# Altium PCB UPDATE of PCB2.PcbDoc
Units mm, origin at the board's own origin, x right, y up, seen from the top; angles counter-clockwise.
Board outline 152.4 x 101.6 mm, 2 copper layers (Top Layer, Bottom Layer); 49 components, 40 nets, 237 pads, 69 vias.
Unrouted connection lines stored in the file: 2.
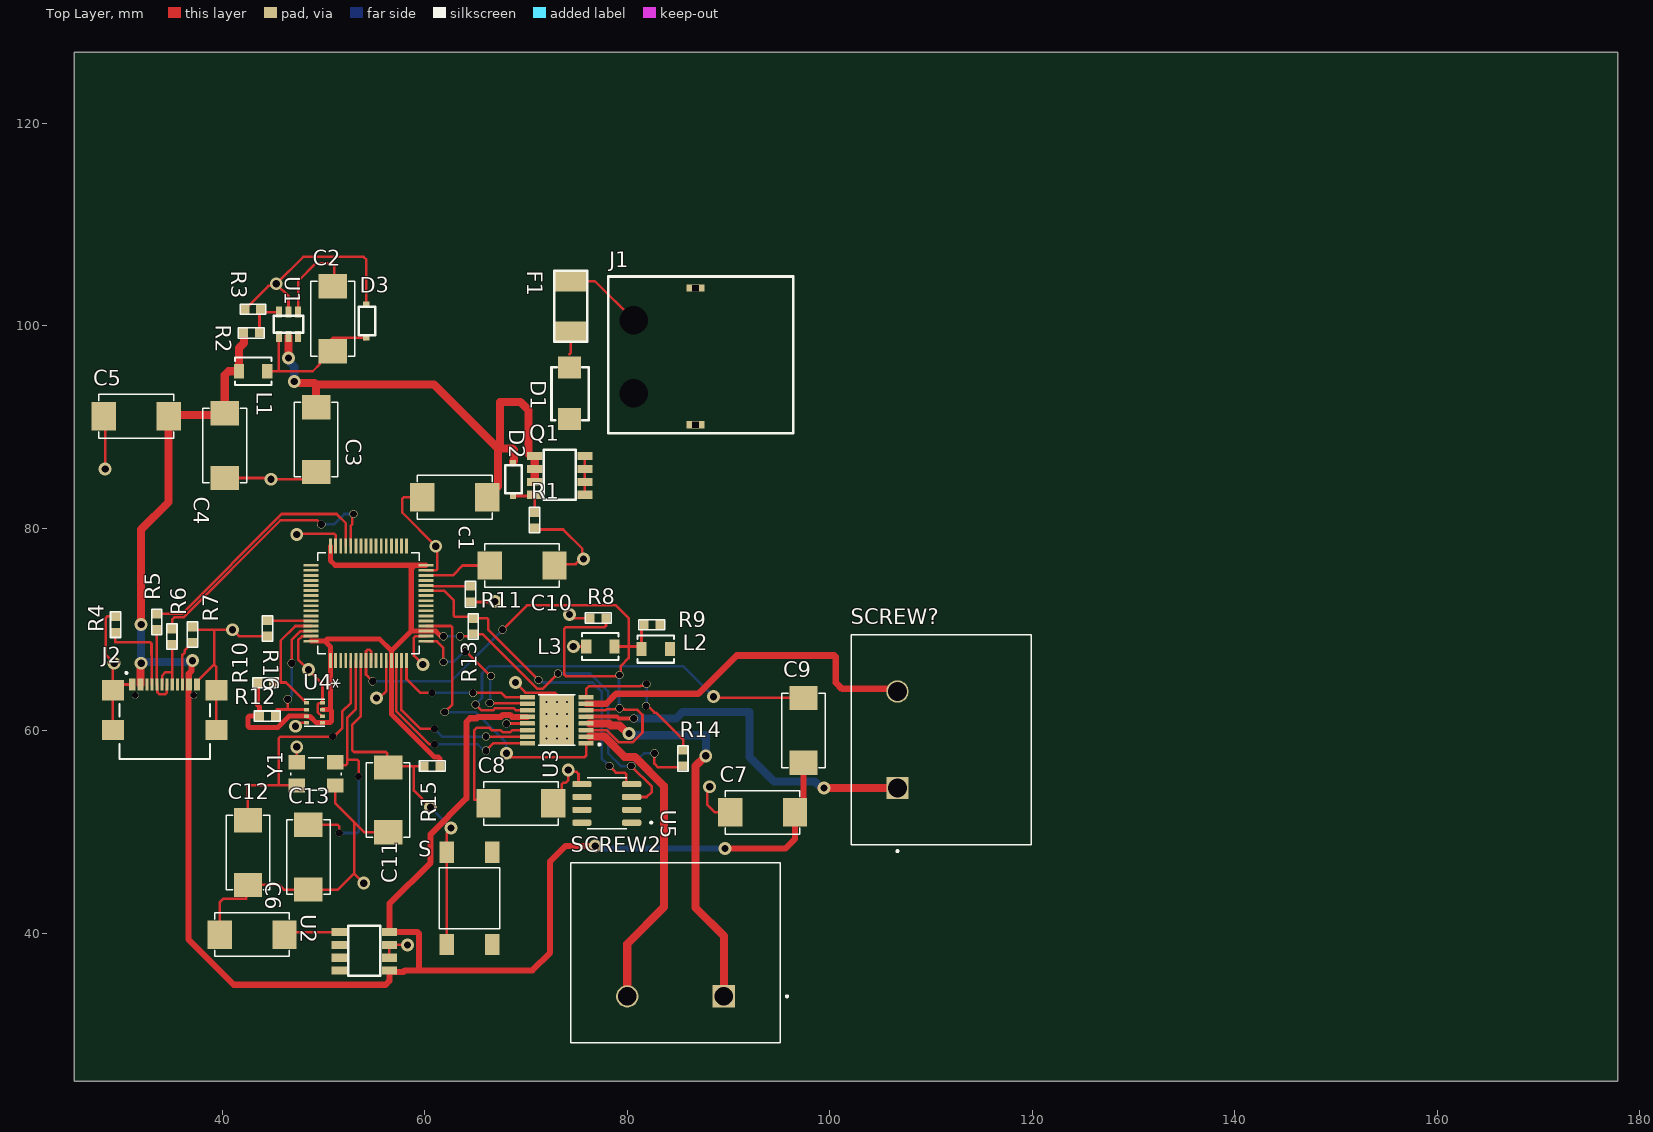
[diagram p0: Top Layer view]
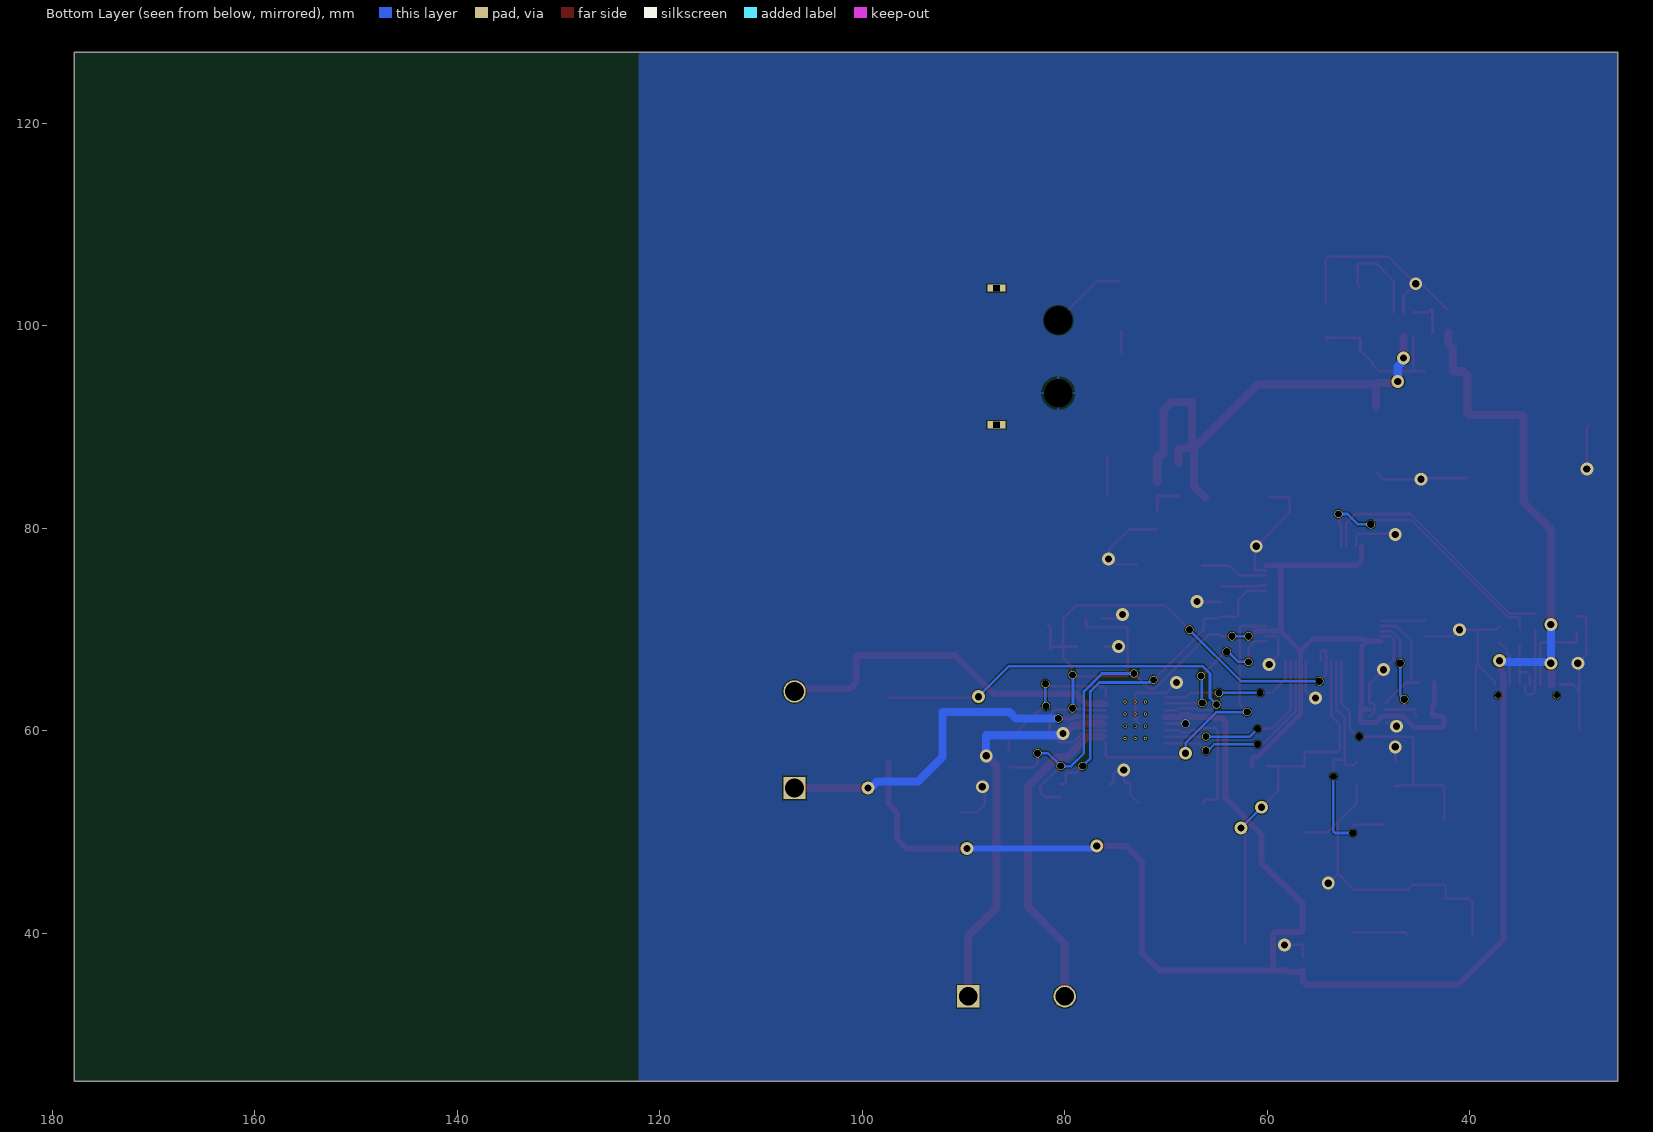
[diagram p1: Bottom Layer view, seen from below]

## Layer stack, top to bottom
Top Solder: solder mask 0.0102, Solder Resist, Dk 3.5
Top Layer: signal copper 0.0356
Dielectric 1: dielectric 0.32, FR-4, Dk 4.8
Bottom Layer: signal copper 0.0356
Bottom Solder: solder mask 0.0102, Solder Resist, Dk 3.5

## Board outline
25.4,25.4 177.8,25.4 177.8,127 25.4,127

## Design rules (kind name [scope] priority, off if disabled: settings)
Clearance [All] p1: gap=0.1 ignorepadtopadclearanceinfootprint=FALSE
PolygonConnect [All] p1: connectstyle=Relief reliefconductorwidth=0.254 reliefentries=4 polygonreliefangle="90 Angle" airgapwidth=0.254
RoutingVias [All] p1: holewidth=0.711 width=1.27 viastyle="Through Hole" minholewidth=0.711 minwidth=0.1 maxholewidth=0.711 maxwidth=1.27
SolderMaskExpansion [All] p1: expansion=0.102 istentingtop=FALSE
SupplyNets "Schematic Supply Nets_4" [InNet('+5')] p1: voltage=0.000
SupplyNets "Schematic Supply Nets_3" [InNet('24V')] p2: voltage=0.000
SupplyNets "Schematic Supply Nets_2" [InNet('+3.3')] p3: voltage=0.000
SupplyNets "Schematic Supply Nets_1" [InNet('+3V3')] p4: voltage=0.000
SupplyNets "Schematic Supply Nets" [InNet('GND')] p5: voltage=0.000
Width [All] p1: maxlimit=0.254 minlimit=0.254 preferedwidth=0.254
30 further rules are at their usual default settings.

## Components (designator, comment, footprint, x,y, rotation, side; value= is the part's Value field where it differs from the comment)
* "mcu" MCU 68.298,91.141 r90 top
c1 "100 uF" "CAPACITOR SMD" 43.028,-140.716 r180 top
C2 "100 uF" "CAPACITOR SMD" 274.701,80.747 r270 top
C3 "4.7uF" "CAPACITOR SMD" 273.05,68.809 r270 top
C4 "3.3uF" "CAPACITOR SMD" 264.033,68.224 r270 top
C5 "1 uF" "CAPACITOR SMD" 51.46,314.833 r0 top
C6 "1 uF" "CAPACITOR SMD" 62.89,263.652 r0 top
C7 "10 uF" "CAPACITOR SMD" 73.431,-171.831 r180 top
C8 "2.2 nF" "CAPACITOR SMD" 89.433,276.606 r0 top
C9 "0.01 uF" "CAPACITOR SMD" 321.183,40.107 r270 top
C10 "22 uF" "CAPACITOR SMD" 89.56,300.101 r0 top
C11 "100nF" "CAPACITOR SMD" -167.386,73.127 r90 top
C12 "20 pF" "CAPACITOR SMD" 266.319,28.042 r270 top
C13 "1000 uF" "CAPACITOR SMD" -175.26,67.462 r90 top
D1 "TVS diode" "TVS DIODE" -241.427,396.367 r90 top
D2 "zener diode" "ZENER DIODE" 70.231,89.154 r90 top
D3 "550mV 1A" ?#1 54.229,100.584 r90 top
F1 "fuse" FUSE -386.334,721.106 r90 top
J1 "Connector" CONNECTOR 84.582,92.798 r270 top
J2 "USB4110GFA" GCT_USB4110GFA 34.321,63.5 r0 top
L1 "15uH" INDUCTOR 30.483,91.186 r0 top
L2 "1uH" INDUCTOR 70.234,63.754 r0 top
L3 "1uH" INDUCTOR 89.919,72.644 r180 top
Q1 "Mosfet" MOSFET-DMP3007LSS 74.041,84.201 r270 top
R1 "10k" RESISTOR 71.863,-62.052 r90 top
R2 "58K" RESISTOR 185.75,100.311 r180 top
R3 "10K" RESISTOR -99.822,100.603 r0 top
R4 "5.1K" RESISTOR 28.467,213.36 r270 top
R5 "22" RESISTOR 32.531,213.614 r270 top
R6 "22" RESISTOR 36.049,-73.558 r90 top
R7 "5.1K" RESISTOR 38.081,-73.355 r90 top
R8 "0.1" RESISTOR -65.735,70.123 r0 top
R9 "0.1" RESISTOR 225.298,71.482 r180 top
R10 "4.7k" RESISTOR 187.147,65.767 r180 top
R11 "10K" RESISTOR 63.519,216.357 r270 top
R12 "4.7k" RESISTOR 187.325,62.465 r180 top
R13 "4.7k" RESISTOR 63.773,213.182 r270 top
R14 "10K" RESISTOR 84.474,200.152 r270 top
R15 "10K" RESISTOR -82.118,55.518 r0 top
R16 "22" RESISTOR 43.453,212.979 r270 top
S "switch" SWITCH 51.979,61.109 r270 top
SCREW2 "screw" screw 195.072,404.368 r180 top
SCREW? "screw" screw 477.266,-51.181 r90 top
U1 "buck" ?#2 -64.892,108.966 r270 top
U2 "LDO" LDO -57.658,47.117 r270 top
U3 "DRV8833PWP" IC_DRV8833PWP 73.041,61.052 r180 top
U4 "TEMP" "TEMP SENSOR" 44.158,61.778 r180 top
U5 "DS18B20Z+" SOIC127P600X175-8N 77.978,52.832 r180 top
Y1 "CRYSTAL" PCBComponent_1 48.382,48.507 r270 top

## Footprints (in the part's own frame and the unit in brackets; to place one, negate y for a bottom-side part, rotate by r counter-clockwise, add the part's x,y. Pads: shape width x height; smd on the part's side, far side on the other; paste and mask are expansions set on the pad)
"CAPACITOR SMD" [mm]
  rect 2.4x2.8 smd: 1(-23.139,-223.774) 2(-16.739,-223.774)
  silkscreen extent -23.62,-225.93 -16.26,-221.61, body extent -23.64,-225.92 -16.24,-221.62, height 1.9
CONNECTOR [mil]
  round 60 hole 110.24: 1(-305,-155) 2(-21.54,-155)
  rect 27.56x70.87 hole 23.62 square: 28(-430,85) 28(101.5,85)
  silkscreen extent -475,-255 135,465, body extent -470,-224 140,454, height 331
FUSE [mm]
  rect 1.96x3.15 smd: 1(-621.665,-460.756) 2(-616.745,-460.756)
  silkscreen extent -622.68,-462.41 -615.7,-459.1, body extent -622.3,-462.15 -616.2,-459.36, height 2.53
GCT_USB4110GFA [mm]
  rect 0.6x1.15 smd: A1/B12(-3.2,1.075) A4/B9(-2.4,1.075) B1/A12(3.2,1.075) B4/A9(2.4,1.075)
  rect 0.3x1.15 smd: A5(-1.25,1.075) A6(-0.25,1.075) A7(0.25,1.075) A8(1.25,1.075) B5(1.75,1.075) B6(0.75,1.075) B7(-0.75,1.075) B8(-1.75,1.075)
  rect 2.18x2 smd: S1(-5.11,0.5) S2(5.11,0.5) S3(-5.11,-3.43) S4(5.11,-3.43)
  round 0.65 hole 0.65 unplated: ""(-2.89,0) ""(2.89,0)
  silkscreen extent -4.47,-6.28 4.47,2.33, body extent -5.65,-6.28 5.65,1.42, height 3.26
IC_DRV8833PWP [mm]
  rrect25% 1.5x0.45 smd: 1(-2.9,2.275) 2(-2.9,1.625) 3(-2.9,0.975) 4(-2.9,0.325) 5(-2.9,-0.325) 6(-2.9,-0.975) 7(-2.9,-1.625) 8(-2.9,-2.275) 9(2.9,-2.275) 10(2.9,-1.625) 11(2.9,-0.975) 12(2.9,-0.325) 13(2.9,0.325) 14(2.9,0.975) 15(2.9,1.625) 16(2.9,2.275)
  rect 3.4x5 smd paste-3 mask+0: 17(0,0)
  round 0.3 hole 0.2 mask+0: 18(-1,1.8) 19(0,1.8) 20(1,1.8) 22(0,0.6) 23(1,0.6) 24(-1,-0.6) 25(0,-0.6) 26(1,-0.6) 27(-1,-1.8) 28(0,-1.8) 29(1,-1.8) ""(-1,0.6)
  silkscreen extent -4.3,-2.5 1.83,2.5, body extent -3.2,-2.5 3.2,2.5, height 1.2
INDUCTOR [mm]
  rect 1x1.4 smd paste+0 mask+0.102: 1(11.173,4.318) 2(13.973,4.318)
  silkscreen extent 10.77,2.97 14.37,5.67, body extent 10.89,3.19 14.25,5.7, height 2.17
LDO [mm]
  rect 0.802x1.505 smd mask-2539.97: 1(6.985,109.22) 2(8.255,109.22) 3(9.525,109.22) 4(10.795,109.22) 5(6.985,114.173) 6(8.255,114.173) 7(9.525,114.173) 8(10.795,114.173)
  silkscreen extent 6.35,110.11 11.3,113.28, body extent 6.31,108.81 11.21,114.81, height 1.75
MCU [mm]
  rect 1.47x0.28 smd: 1(-24.212,17.593) 2(-24.212,17.093) 3(-24.212,16.593) 4(-24.212,16.093) 5(-24.212,15.593) 6(-24.212,15.093) 7(-24.212,14.593) 8(-24.212,14.093) 9(-24.212,13.593) 10(-24.212,13.093) 11(-24.212,12.593) 12(-24.212,12.093) 13(-24.212,11.593) 14(-24.212,11.093) 15(-24.212,10.593) 16(-24.212,10.093) 33(-12.872,10.093) 34(-12.872,10.593) 35(-12.872,11.093) 36(-12.872,11.593) 37(-12.872,12.093) 38(-12.872,12.593) 39(-12.872,13.093) 40(-12.872,13.593) 41(-12.872,14.093) 42(-12.872,14.593) 43(-12.872,15.093) 44(-12.872,15.593) 45(-12.872,16.093) 46(-12.872,16.593) 47(-12.872,17.093) 48(-12.872,17.593)
  rect 0.28x1.47 smd: 17(-22.292,8.173) 18(-21.792,8.173) 19(-21.292,8.173) 20(-20.792,8.173) 21(-20.292,8.173) 22(-19.792,8.173) 23(-19.292,8.173) 24(-18.792,8.173) 25(-18.292,8.173) 26(-17.792,8.173) 27(-17.292,8.173) 28(-16.792,8.173) 29(-16.292,8.173) 30(-15.792,8.173) 31(-15.292,8.173) 32(-14.792,8.173) 49(-14.792,19.513) 50(-15.292,19.513) 51(-15.792,19.513) 52(-16.292,19.513) 53(-16.792,19.513) 54(-17.292,19.513) 55(-17.792,19.513) 56(-18.292,19.513) 57(-18.792,19.513) 58(-19.292,19.513) 59(-19.792,19.513) 60(-20.292,19.513) 61(-20.792,19.513) 62(-21.292,19.513) 63(-21.792,19.513) 64(-22.292,19.513)
  silkscreen extent -23.54,8.84 -13.54,18.84, body extent -24.54,7.84 -12.54,19.84, height 1.59
MOSFET-DMP3007LSS [mil]
  rect 31.57x59.25 smd mask-99999: D(-115,70) D(-65,70) D(-15,70) D(35,70) G(35,-125) S(-115,-125) S(-65,-125) S(-15,-125)
  silkscreen extent -140,-90 55,35, body extent -138,-141 55,96, height 69
PCBComponent_1 [mm]
  rect 1.4x1.6 smd: 1(-8.389,2.789) 2(-8.389,-1.011) 3(-6.089,-1.011) 4(-6.089,2.789)
  silkscreen extent -8.84,-1.61 -5.64,3.39, body extent -8.84,-1.61 -5.64,3.39, height 1
RESISTOR [mm]
  rect 0.9x0.95 smd mask+0.05: 1(143.637,0.997) 2(142.062,0.997)
  silkscreen extent 141.6,0.51 144.14,1.52, body extent 142.07,0.62 143.68,1.42, height 0.55
screw [mil]
  rect 86.78x86.78 / inner round 86.78 / far side rect 86.78x86.78 hole 72.99 mask+4.02: 1(4155,14590)
  round 86.78 hole 72.99 mask+4.02: 2(4530.2,14590)
  silkscreen extent 3905,14070 4750,14770, body extent 3934,14075 4745,14775, height 345
SOIC127P600X175-8N [mm]
  rrect50% 1.9x0.6 smd paste+0 mask+0.102: 1(-2.455,1.905) 2(-2.455,0.635) 3(-2.455,-0.635) 4(-2.455,-1.905) 5(2.455,-1.905) 6(2.455,-0.635) 7(2.455,0.635) 8(2.455,1.905)
  silkscreen extent -4.49,-2.52 1.95,2.52, body extent -3,-2.49 3,2.49, height 1.68
SWITCH [mm]
  rect 2.1x1.4 smd paste+0 mask+0.102: 1(13.103,14.696) 2(22.203,14.696) 3(13.103,10.196) 4(22.203,10.196)
  silkscreen extent 14.65,9.45 20.65,15.45, body extent 13.03,9.45 23.03,15.45, height 4.28
"TEMP SENSOR" [mm]
  rect 0.5x0.35 smd: 1(-4.153,0.975) 2(-4.153,0.325) 3(-4.153,-0.325) 4(-4.153,-0.975) 5(-5.753,-0.975) 6(-5.753,-0.325) 7(-5.753,0.325) 8(-5.753,0.975)
  silkscreen extent -5.95,-1.35 -3.95,1.35, body extent -5.95,-1.25 -3.95,1.25, height 1
"TVS DIODE" [mm]
  rect 2.16x2.26 smd: (+)(-305.562,-315.722) (-)(-300.482,-315.722)
  silkscreen extent -305.69,-317.63 -300.48,-313.94, body extent -305.85,-317.53 -300.45,-313.91, height 2.5
"ZENER DIODE" [mm]
  rect 0.55x0.6 smd: 1(-5.969,1.524) 2(-2.667,1.524)
  silkscreen extent -5.71,0.63 -2.92,2.29, body extent -6.22,0.69 -2.42,2.29, height 1
?#1 [mm]
  rect 0.55x0.6 smd: 1(-1.778,0) 2(1.524,0)
  silkscreen extent -1.52,-0.89 1.27,0.76, body extent -2.03,-0.84 1.77,0.76, height 1
?#2 [mm]
  rect 1.1x0.6 smd: 1(7.62,112.39) 2(7.62,111.44) 3(7.62,110.49) 4(10.033,112.39) 5(10.033,111.44) 6(10.033,110.49)
  silkscreen extent 8,109.98 9.65,112.9, body extent 7.49,110.06 10.29,112.96, height 1.1

## Part data
c1 C2 C3 C4 C5 C6 C7 C8 C9 C10 C11 C12 C13: library part "capacitor SMD"
D3: library part diode
J1: library part hkhk
J2: "USB-C (USB TYPE-C) USB 2.0 Receptacle Connector 24 (16+8 Dummy) Position Surface Mount, Right Angle", Package=None, Check_prices=https://www.snapeda.com/parts/USB4110GFA/Global+Connector+Technology/view-part/?ref=eda, MF="Global Connector Technology", MP=USB4110GFA, SnapEDA_Link=https://www.snapeda.com/parts/USB4110GFA/Global+Connector+Technology/view-part/?ref=snap
L1 L2 L3: library part inductor
R1 R2 R3 R4 R5 R6 R7 R8 R9 R10 R11 R12 R13 R14 R15 R16: library part resistor
U3: "10.8-V, 2-A dual H-bridge motor driver with current regulation", Package="HTSSOP-16 Texas Instruments", Check_prices=https://www.snapeda.com/parts/DRV8833PWP/Texas+Instruments/view-part/?ref=eda, MF="Texas Instruments", MP=DRV8833PWP, SnapEDA_Link=https://www.snapeda.com/parts/DRV8833PWP/Texas+Instruments/view-part/?ref=snap
U5: "Programmable Resolution 1-Wire Digital Thermometer", Package="SOIC-8 Maxim", Check_prices=https://www.snapeda.com/parts/DS18B20Z+/Analog+Devices/view-part/?ref=eda, MF="Analog Devices", MP=DS18B20Z+, SnapEDA_Link=https://www.snapeda.com/parts/DS18B20Z+/Analog+Devices/view-part/?ref=snap

## Via types
v1: diameter 1.27, hole 0.711, Top Layer to Bottom Layer, 35 vias
v2: diameter 0.8, hole 0.711, Top Layer to Bottom Layer, 28 vias
v3: diameter 0.711, hole 0.711, Top Layer to Bottom Layer, 6 vias

## Nets (pads, with @x,y where several pads share a name; then routed paths per layer and width w, separated by ;. In a path a pad name is that pad's centre, name@x,y a point inside that pad or via, vN(x,y) a via of type N, cw(c..) or ccw(c..) an arc to the next point about the centre after c; other vN are vias at no path point)
1: R14.2 U3.8 | length 15.3
  Top Layer w0.254: U3.8 75.941,64.13 76.2,64.389 81.258,64.389 81.318,64.449 81.721,64.449 v2(81.915,64.643) ; v2(81.864,62.433) 82.04,62.433 82.671,61.803 82.85,61.803 85.517,59.136 85.517,58.136 R14.2
  Bottom Layer w0.254: v2(81.864,62.433) 81.915,62.484 v2(81.915,64.643)
3: *.44 R6.1 | length 26.7
  Top Layer w0.254: R6.1 35.052,70.971 35.279,71.198 36.164,71.198 45.738,80.772 49.403,80.772 v2(49.784,80.391) ; *.44 52.705,80.264 52.832,80.391 52.832,81.28 v2(52.959,81.407)
  Bottom Layer w0.254: v2(49.784,80.391) 51.054,80.391 52.07,81.407 v2(52.959,81.407)
6: *.45 R5.2 | length 25.4
  Top Layer w0.254: R5.2 36.017,71.552 45.872,81.407 51.308,81.407 52.205,80.51 *.45
8: *.8 *.9 L2.1 L3.1 R8.1 R9.1 U3.3 U3.6 | length 77.5
  Top Layer w0.254: *.9 54.718,66.942 54.718,67.799 54.737,67.818 54.564,67.991 54.354,67.991 54.205,67.842 *.8 54.205,65.556 v2(54.864,64.897) ; v2(67.691,69.977) 70.104,72.39 78.867,72.39 80.137,71.12 80.137,68.326 ; U3.3 77.972,60.077 79.182,58.867 80.531,58.867 81.507,59.842 81.507,61.571 81.002,62.076 79.712,62.076 79.761,62.125 77.956,62.125 77.858,62.027 U3.6 ; R8.1 77.902,70.38 77.753,70.231 73.936,70.231 73.787,70.082 73.787,65.554 73.936,65.405 79.148,65.405 v2(79.248,65.505) ; L3.1 80.137,68.326 ; v2@79.298,65.455 79.375,65.532 79.375,66.421 80.137,67.183 80.137,68.326 ; R9.1 81.407,70.231 L2.1 81.153,68.326 80.137,68.326
  Bottom Layer w0.254: v2(54.864,64.897) 62.611,64.897 v2(67.691,69.977) ; v2@79.121,62.23 79.184,62.293 79.184,65.441 v2(79.248,65.505)
  other v2: 79.248,62.23
24V: c1.1 C3.1 D2.2 Q1.S U1.5 | length 53.3
  Top Layer w0.8: v1(46.548,96.808) U1.5 ; v1(47.117,94.488) 47.244,94.361 49.127,94.361 49.276,94.212 ; C3.1 49.276,94.212 ; c1.1 67.24,84.131 67.24,87.687 67.339,87.786 ; D2.2 D2.2@68.707,86.614 ; D2.2@68.834,86.614 68.834,87.735 68.685,87.884 67.437,87.884 ; Q1.S@70.866,84.582 70.866,85.852 70.866,87.122 70.514,87.122 70.24,87.396 70.24,87.642 70.231,87.652 70.231,91.694 69.469,92.456 67.437,92.456 67.437,87.884 ; 49.276,94.212 60.912,94.212 67.339,87.786 ; 67.339,87.786 67.437,87.884
  Bottom Layer w0.8: v1(46.548,96.808) 46.548,96.533 47.117,95.964 v1(47.117,94.488)
+3.3: *.1 *.13 *.19 *.32 *.48 *.64 R10.1 R12.1 R13.1 R14.1 R15.1 U4.2 U4.6 U4.8 U5.3 | length 110.8
  Top Layer w0.254: v2(63.5,69.342) 64.567,69.342 R13.1 65.71,69.545 71.12,64.135 71.628,64.135 v2(73.152,65.659) ; v2(80.391,56.515) 82.423,54.483 82.423,53.975 81.915,53.467 U5.3 ; v2(82.677,57.785) 82.677,56.769 83.058,56.388 85.344,56.388 R14.1
  Top Layer w0.5: R10.1 43.51,62.535 43.688,62.357 R12.1 42.694,61.468 42.545,61.319 42.545,60.474 42.694,60.325 45.496,60.325 46.624,61.453 U4.2 48.359,61.405 48.678,61.405 49.28,60.803 U4.8 50.651,60.803 50.8,60.952 50.8,61.954 50.651,62.103 ; *.64 50.15,68.849 ; U4.6 50.651,62.103 ; *.48 50.705,76.803 51.159,76.349 59.055,76.349 ; *.32 59.055,76.349 ; R15.1 61.519,57.255 61.37,57.404 60.96,57.404 56.705,61.659 *.13 56.718,66.942 56.718,67.894 ; v2(61.849,69.342) 61.595,69.342 61.101,69.836 60.138,69.836 *.19 58.673,69.849 ; 50.15,68.849 50.389,69.088 55.524,69.088 56.718,67.894 ; 50.15,68.849 50.705,68.294 *.1 50.705,62.157 50.651,62.103 ; 56.718,67.894 58.673,69.849 ; 58.673,69.849 58.673,75.967 59.055,76.349
  Bottom Layer w0.254: v2(61.849,69.342) v2(63.5,69.342) ; v2(73.152,65.659) 76.327,65.659 78.105,63.881 78.105,57.785 79.375,56.515 v2(80.391,56.515) 81.661,57.785 v2(82.677,57.785)
+3V3: C6.2 U2.1 | length 5.5
  Top Layer w0.254: C6.2 46.405,40.132 U2.1
+5: C4.1 C5.2 C7.1 C9.2 J2.A4/B9 J2.B4/A9 L1.1 R2.1 U2.5 U2.8 U3.12 | length 194.3
  Top Layer w0.6: v1(37.084,66.929) 36.979,66.824 36.979,65.913 36.703,65.637 36.703,64.593 J2.B4/A9 36.659,64.513 36.659,39.414 41.148,34.925 56.134,34.925 56.515,35.306 U2.8 56.642,36.195 57.89,36.195 58.039,36.344 59.436,36.344 ; U3.12 68.62,61.377 68.429,61.568 67.715,61.568 67.524,61.377 65.263,61.377 65.127,61.241 64.486,61.241 64.116,60.871 64.116,53.321 60.579,49.784 60.579,46.99 56.515,42.926 U2.5 59.287,40.132 59.436,39.983 59.436,36.344 ; v1(76.835,48.641) 73.914,48.641 72.39,47.117 72.39,38.1 70.634,36.344 59.436,36.344 ; v1(89.662,48.387) 95.631,48.387 96.57,49.326 C7.1 97.409,52.782 C9.2
  Top Layer w0.8: J2.A4/B9 31.921,66.592 v1(32.004,66.675) ; v1(32.004,70.485) 32.004,79.883 34.721,82.6 C5.2 34.848,91.186 40.082,91.186 C4.1 40.259,95.123 40.64,95.504 L1.1 41.656,97.79 42.164,98.298 42.164,99.263 R2.1
  Bottom Layer w0.6: v1(76.835,48.641) 77.089,48.387 v1(89.662,48.387)
  Bottom Layer w0.8: v1(32.004,70.485) v1(32.004,66.675) 32.131,66.802 36.957,66.802 v1(37.084,66.929)
AIN1: *.14 U3.16 | length 19.9
  Top Layer w0.254: *.14 57.205,61.921 60.439,58.687 60.947,58.687 v3(60.96,58.674) ; v2(66.04,58.039) 66.778,58.777 U3.16
  Bottom Layer w0.254: v3(60.96,58.674) 65.238,58.674 65.873,58.039 v2(66.04,58.039)
AIN2: *.15 U3.15 | length 18.4
  Top Layer w0.254: *.15 57.705,62.056 59.563,60.198 v3(60.96,60.198) ; v2(66.04,59.436) 66.049,59.427 U3.15
  Bottom Layer w0.254: v3(60.96,60.198) 61.722,59.436 v2(66.04,59.436)
BIN1: *.16 U3.9 | length 14.5
  Top Layer w0.254: *.16 58.205,65.112 59.563,63.754 v3(60.706,63.754) ; v2(64.77,63.754) 67.564,63.754 67.991,63.327 U3.9
  Bottom Layer w0.254: v3(60.706,63.754) v2(64.77,63.754)
BIN2: *.17 U3.10 | length 16
  Top Layer w0.254: *.17 60.138,68.836 61.212,68.836 61.849,68.199 v2(61.849,66.802) ; v2(64.008,67.818) 64.072,67.818 66.484,65.405 v2(66.548,65.405) ; v2(66.421,62.738) 70.08,62.738 U3.10
  Bottom Layer w0.254: v2(61.849,66.802) 62.865,66.802 63.881,67.818 v2(64.008,67.818) ; v2(66.421,62.738) 66.484,62.801 66.484,65.341 v2(66.548,65.405)
DQ: *.27 R13.2 U5.4 | length 34.2
  Top Layer w0.254: *.27 61.914,73.849 62.865,72.898 62.865,71.396 63.014,71.247 64.643,71.247 R13.2 66.145,71.12 66.294,70.971 66.294,69.977 v2(71.247,65.024) ; v2(78.232,56.515) 78.867,55.88 79.734,55.88 79.883,55.731 79.883,54.908 80.054,54.737 U5.4
  Bottom Layer w0.254: v2(71.247,65.024) 71.395,65.024 71.649,64.77 76.581,64.77 77.47,63.881 77.47,57.277 77.978,56.769 78.232,56.769 v2(78.232,56.515)
GND: *.12 *.18 *.31 *.47 *.63 c1.2 C3.2 C4.2 C5.1 C6.1 C7.2 C8.2 C10.2 C11.1 C12.2 C13.1 D3.2 J1.2 J2.A1/B12 J2.B1/A12 J2.S1 J2.S2 J2.S3 J2.S4 L2.2 L3.2 R1.2 R3.2 R4.2 R7.1 R8.2 R9.2 R11.1 R16.1 U1.2 U2.6 U2.7 U3.13 U3.17 U4.1 U4.5 U4.7 U5.5 Y1.2 Y1.4 | length 182.2
  Top Layer w0.254: C5.1@28.321,90.098 28.448,89.971 v1(28.448,85.852) ; J2.S3 J2.S1 ; R4.2 28.673,71.298 28.524,71.149 28.524,67.488 v1(29.337,66.675) 29.211,66.549 J2.S1 ; J2.A1/B12 29.786,64.575 J2.S1 ; R7.1 37.389,69.977 39.205,69.977 ; J2.B1/A12 37.521,64.85 39.205,66.534 ; J2.S4 J2.S2 39.431,66.308 39.205,66.534 ; C6.1 39.751,43.053 40.132,43.434 42.396,43.434 42.396,44.632 C12.2 45.643,44.781 46.101,44.323 C13.1 51.435,44.323 53.023,45.91 ; C4.2 44.704,84.963 v1(44.831,84.836) 48.564,84.836 C3.2 ; R3.2 42.24,101.625 44.561,103.946 45.145,103.946 v1(45.339,104.14) ; R16.1 41.656,69.342 v1(41.021,69.977) 39.205,69.977 ; U1.2 46.548,102.931 v1(45.339,104.14) ; v1(47.244,60.452) 47.595,60.803 U4.1 ; Y1.2 v1(47.371,58.42) ; v1(47.371,79.375) 47.474,79.478 51.056,79.478 51.205,79.329 *.47 ; *.63 48.772,69.336 47.873,69.336 47.498,68.961 47.498,67.056 v1(48.514,66.04) 49.911,64.643 U4.5 49.863,62.705 49.535,62.705 49.434,62.604 49.434,61.834 49.567,61.701 49.588,61.701 49.836,61.453 U4.7 ; Y1.4 51.171,52.842 53.023,50.99 ; v1(53.975,44.958) 53.023,45.91 ; D3.2 54.229,106.553 53.975,106.807 48.006,106.807 v1(45.339,104.14) ; v1(55.245,63.246) 55.499,63.246 56.205,63.952 *.12 ; C11.1 54.025,49.988 53.023,50.99 ; U2.7 U2.6 v1(58.293,38.862) ; c1.2 57.912,83.058 57.763,82.909 57.763,82.699 57.785,82.677 57.785,81.534 v1(61.087,78.232) 61.244,78.075 61.244,75.998 61.095,75.849 *.31 ; v1(59.817,66.548) 58.928,67.437 58.928,69.193 59.077,69.342 60.118,69.342 *.18 ; R11.1 66.878,72.72 v1(66.929,72.771) ; v2(68.072,60.706) 68.093,60.727 U3.13 ; v1(68.961,64.77) 69.95,63.781 72.849,63.781 73.025,63.605 73.025,61.29 73.152,61.163 U3.17 ; R1.2 70.993,79.883 73.66,79.883 75.565,77.978 75.565,77.089 v1(75.692,76.962) 75.417,76.962 74.909,76.454 72.948,76.454 C10.2 ; C8.2 73.533,53.671 73.533,54.715 73.682,54.864 73.914,54.864 74.168,55.118 v1(74.168,56.134) 74.362,55.94 74.997,55.94 75.184,55.753 75.184,54.908 75.311,54.908 75.482,54.737 U5.5 ; U3.17@72.716,60.727 U3.17 ; U3.17@72.771,61.322 U3.17 ; v1(74.295,71.501) 74.676,71.12 R8.2 ; v1(74.676,68.326) L3.2 ; v1(88.138,54.483) 87.884,54.229 87.884,52.705 88.646,51.943 C7.2 ; 39.205,66.534 39.205,69.977 ; 53.023,45.91 53.023,50.99
IN: *.5 C12.1 Y1.3 | length 26.5
  Top Layer w0.254: C12.1 42.545,54.461 42.694,54.61 45.593,54.61 ; Y1.3@46.746,54.596 Y1.3 ; Y1.3@46.746,54.61 45.593,54.61 ; *.5 52.705,62.738 51.856,61.889 51.856,60.238 51.054,59.436 v3(50.927,59.436) 45.742,59.436 45.593,59.287 45.593,54.61
Net*_7: *.7 C11.2 R15.2 S.3 S.4 | length 37.1
  Top Layer w0.254: *.7 53.705,61.452 52.856,60.603 52.856,58.074 53.018,57.912 56.134,57.912 56.283,57.763 56.283,56.493 C11.2 56.515,56.515 58.928,56.515 ; R15.2 58.928,56.515 ; v1(60.579,52.451) 58.928,54.102 58.928,56.515 ; S.4 S.3 62.175,49.856 62.611,50.292 v1(62.611,50.419)
  Bottom Layer w0.254: v1(60.579,52.451) v1(62.611,50.419)
Net*_28: *.28 R11.2 | length 4.4
  Top Layer w0.254: *.28 60.72,74.349 60.774,74.295 R11.2
Net*_30: *.30 C10.1 | length 6.7
  Top Layer w0.254: *.30 62.776,75.349 63.754,76.327 C10.1
Net*_60: *.60 R16.2 | length 4.3
  Top Layer w0.254: R16.2 44.501,70.866 48.173,70.866 48.177,70.862 *.60@48.768,70.862
NetC2_1: C2.1 U1.1 | length 9.6
  Top Layer w0.254: U1.1 47.498,104.394 49.276,106.172 50.905,106.172 51.054,106.023 51.054,104.013 C2.1
NetC2_2: C2.2 D3.1 L1.2 U1.6 | length 15.6
  Top Layer w0.254: L1.2 45.449,95.504 ; U1.6 45.598,95.653 45.449,95.504 ; C2.2@50.8,97.486 50.8,98.679 50.927,98.806 D3.1 ; C2.2 50.727,97.486 49.654,96.413 49.654,96.213 48.945,95.504 45.449,95.504 ; D3.1@54.102,98.654 D3.1@54.102,98.679
NetC8_1: C8.1 U3.14 | length 14.2
  Top Layer w0.254: C8.1 66.294,53.032 66.113,53.213 64.897,53.213 64.897,60.071 65.124,60.298 66.397,60.298 66.618,60.077 67.482,60.077 67.715,59.844 68.429,59.844 68.662,60.077 U3.14
NetC9_1: C9.1 U3.11 | length 42.2
  Top Layer w0.254: v2(65.024,62.611) 65.608,62.027 66.741,62.027 66.944,62.23 68.805,62.23 69.008,62.027 U3.11 ; v1(88.519,63.373) 88.646,63.246 C9.1
  Bottom Layer w0.254: v2(65.024,62.611) 65.659,63.246 65.659,65.659 66.394,66.394 85.498,66.394 v1(88.519,63.373)
NetD1_(+): Q1.D | length 3.8
  Top Layer w0.254: Q1.D@75.819,83.312 75.819,84.582 75.819,85.852 Q1.D@75.819,87.122
NetD1_(-): F1.1 | length 2.3
  Top Layer w0.254: 74.295,97.192 74.422,97.319 F1.1
NetD2_1: D2.1 Q1.G R1.1 | length 3.9
  Top Layer w0.254: D2.1 70.739,83.185 Q1.G R1.1
NetF1_2: F1.2 J1.1 | length 7.7
  Top Layer w0.254: F1.2@74.549,104.394 76.796,104.394 J1.1
NetJ2_A5: J2.A5 R4.1 | length 8.6
  Top Layer w0.254: R4.1 29.464,68.758 32.873,68.758 33.021,68.609 33.021,68.122 33.035,66.725 J2.A5@33.057,64.575
NetJ2_A6: J2.A6 J2.B6 R6.2 | length 6
  Top Layer w0.254: J2.A6 34.071,65.44 34.417,65.786 35.071,65.786 ; R6.2 35.04,68.492 35.071,68.461 35.071,65.786 ; J2.B6 35.071,65.786
NetJ2_A7: J2.A7 J2.B7 R5.1 | length 8.1
  Top Layer w0.254: R5.1 33.54,69.965 J2.B7@33.54,64.575 ; J2.B7 33.594,64.552 33.594,63.815 33.782,63.627 34.395,63.627 34.548,63.78 34.548,64.552 J2.A7
NetJ2_B5: J2.B5 R7.2 | length 4.6
  Top Layer w0.254: J2.B5 36.071,67.491 36.322,67.742 36.322,67.97 37.059,68.707 R7.2
NetR2_2: R2.2 R3.1 U1.3 | length 4.2
  Top Layer w0.254: R2.2 43.688,101.473 R3.1 44.069,101.346 U1.3
NetSCREW2_1: SCREW2.1 U3.4 | length 39.4
  Top Layer w0.254: v1(80.174,59.729) v1@80.174,59.78
  Top Layer w0.8: U3.4@76.291,60.727 78.209,60.727 78.412,60.524 79.252,60.524 80.047,59.729 v1(80.174,59.729) ; v1(87.757,57.531) 86.741,56.515 86.741,42.528 89.535,39.734 SCREW2.1
  Bottom Layer w0.254: v1(80.174,59.729) v1@80.34,59.563
  Bottom Layer w0.8: v1@80.34,59.563 87.757,59.563 v1(87.757,57.531)
NetSCREW2_2: SCREW2.2 U3.2 | length 31.6
  Top Layer w0.254: SCREW2.2@80.002,34.426 80.005,34.423 SCREW2.2
  Top Layer w0.8: U3.2@76.291,59.427 77.735,59.427 79.747,57.415 80.764,57.415 83.646,54.533 83.646,42.603 80.002,38.959 SCREW2.2@80.002,34.426
NetSCREW?_1: SCREW?.1 U3.5 | length 37.1
  Top Layer w0.38: U3.5 75.976,61.412 76.205,61.412 76.21,61.417 78.99,61.417 79.193,61.214 v2(80.645,61.214)
  Top Layer w0.8: v1@99.187,54.356 v1(99.441,54.356) SCREW?.1
  Bottom Layer w0.8: v2(80.645,61.214) 84.836,61.214 85.471,61.849 92.075,61.849 92.075,57.404 94.488,54.991 98.552,54.991 99.187,54.356 v1(99.441,54.356)
NetSCREW?_2: SCREW?.2 U3.7 | length 35.7
  Top Layer w0.65: U3.7 77.917,62.677 78.894,63.654 87.022,63.654 90.805,67.437 100.435,67.437 100.584,67.288 100.584,64.77 101.219,64.135 106.431,64.135 SCREW?.2
NSLEEP: *.20 U3.1 | length 29
  Top Layer w0.254: *.20 62.589,70.349 62.738,70.2 62.738,62.611 v2(61.976,61.849) ; v1(68.072,57.785) 68.448,57.409 75.792,57.409 75.941,57.558 U3.1
  Bottom Layer w0.254: v2(61.976,61.849) 65.024,61.849 68.072,58.801 v1(68.072,57.785)
OUT: *.6 C13.2 Y1.1 | length 25.8
  Top Layer w0.254: C13.2 51.413,50.723 51.562,50.574 v3(51.562,49.911) ; Y1.1 51.484,56.583 52.167,56.583 52.356,56.772 52.356,57.15 ; *.6 53.205,62.153 52.356,61.304 52.356,57.15 ; v3(53.467,55.499) 53.467,57.001 53.318,57.15 52.356,57.15
  Bottom Layer w0.254: v3@51.564,49.913 53.318,49.913 53.467,50.061 v3(53.467,55.499)
SCK: *.61 R10.2 U4.4 | length 11.8
  Top Layer w0.254: R10.2 45.782,64.77 ; U4.4 46.294,64.77 45.782,64.77 ; *.61 47.235,70.349 45.782,68.896 45.782,64.77
SDI: *.62 R12.2 U4.3 | length 12.9
  Top Layer w0.254: R12.2 45.412,61.617 45.412,62.103 46.482,62.103 ; v2(46.482,63.119) 46.482,62.103 ; v2(46.863,66.675) 46.863,68.961 47.751,69.849 *.62 ; U4.3 46.482,62.103
  Bottom Layer w0.254: v2(46.482,63.119) 46.863,63.5 v2(46.863,66.675)
pads on no net: *.2 *.3 *.4 *.10 *.11 *.21 *.22 *.23 *.24 *.25 *.26 *.29 *.33 *.34 *.35 *.36 *.37 *.38 *.39 *.40 *.41 *.42 *.43 *.46 *.49 *.50 *.51 *.52 *.53 *.54 *.55 *.56 *.57 *.58 *.59 D1.(+) D1.(-) J1.28 J2. J2.A8 J2.B8 S.1 S.2 U1.4 U2.2 U2.3 U2.4 U3. U3.18 U3.19 U3.20 U3.22 U3.23 U3.24 U3.25 U3.26 U3.27 U3.28 U3.29 U5.1 U5.2 U5.6 U5.7 U5.8

## Polygon pours and split planes (outlines as drawn)
GND on Bottom Layer "GND" (solid, remove dead copper, pour order 0): 25.4,127 121.793,127 122.047,126.746 122.047,25.4 25.527,25.4 25.4,25.527 25.527,25.4 25.4,25.527